# EAGLE board sonic_beacon-pan (EAGLE 7.5.0)
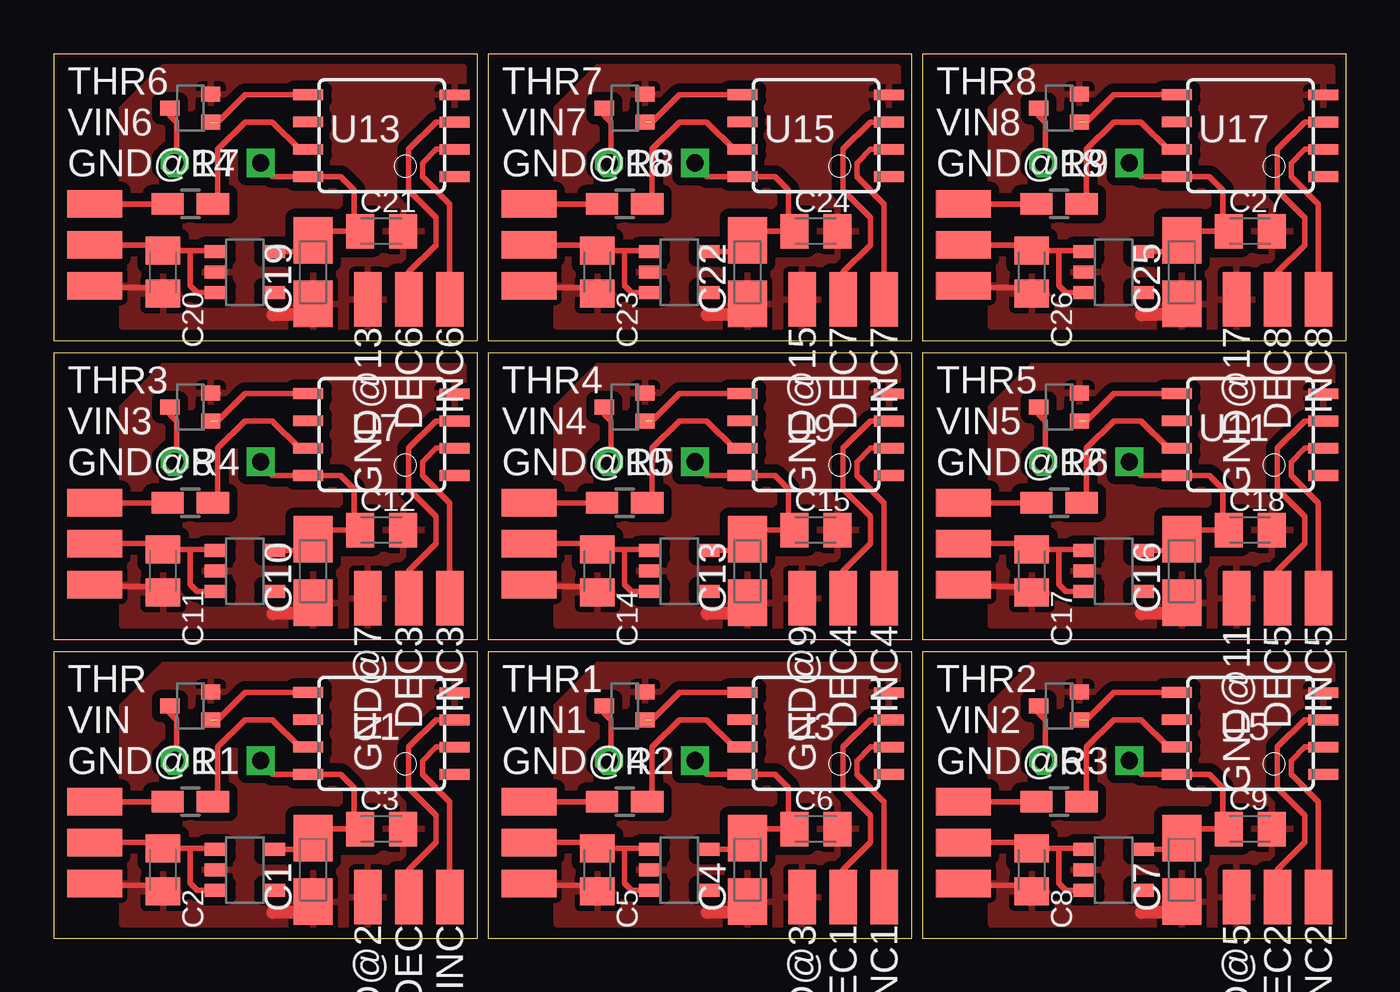
[diagram p0: board, top side]
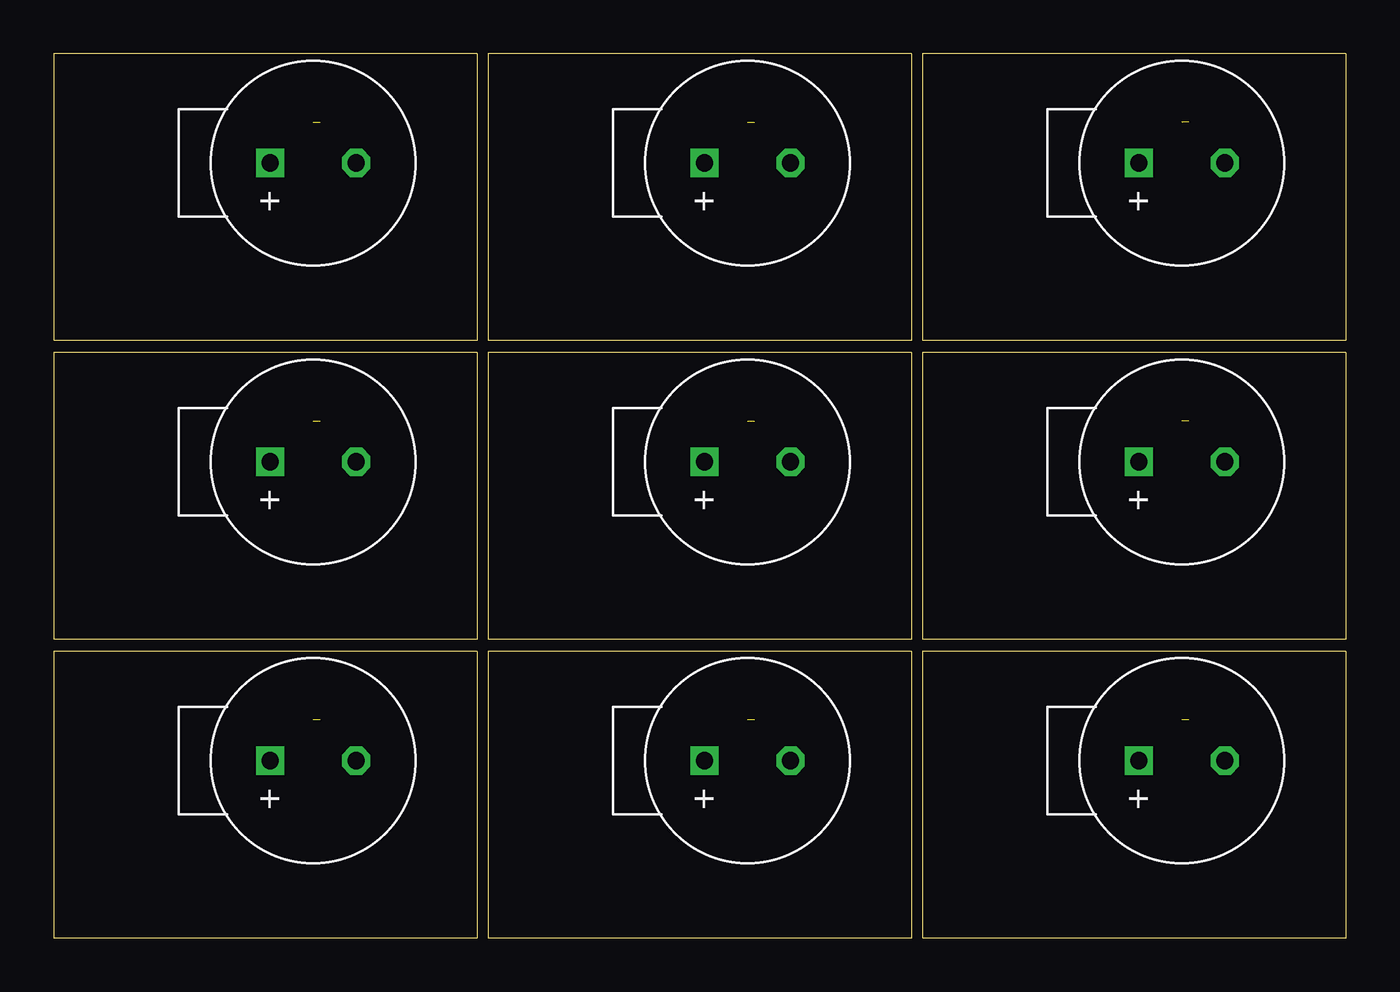
[diagram p1: board, bottom side, seen from below]

Size 60.09 x 41.13 mm. Coordinates in mm from the lower left corner, seen from the top.
Outline: 0,0 19.68,0 19.68,13.34 0,13.34 0,0
Outline: 20.2,0 39.88,0 39.88,13.34 20.2,13.34 20.2,0
Outline: 40.4,0 60.09,0 60.09,13.34 40.4,13.34 40.4,0
Outline: 0,13.9 19.68,13.9 19.68,27.23 0,27.23 0,13.9
Outline: 20.2,13.9 39.88,13.9 39.88,27.23 20.2,27.23 20.2,13.9
Outline: 40.4,13.9 60.09,13.9 60.09,27.23 40.4,27.23 40.4,13.9
Outline: 0,27.8 19.68,27.8 19.68,41.13 0,41.13 0,27.8
Outline: 20.2,27.8 39.88,27.8 39.88,41.13 20.2,41.13 20.2,27.8
Outline: 40.4,27.8 60.09,27.8 60.09,41.13 40.4,41.13 40.4,27.8
Copper layers (1*16): Top 0.035mm / dielectric 1.5mm / Bottom 0.035mm
Design rules "SeeedStudio_2layer_DRU_no_angle_20140221": minimum track width 6mil, minimum drill 12mil, track to track 6mil, track to pad 6mil, pad to pad 6mil, via to via 6mil, smd to smd 0mil, copper to edge 10mil, drill to drill 10mil, minimum pad ring 10mil, minimum via ring 6mil, stop-mask expansion 2mil, vias tented up to drill 100mil, thermal gap 10mil

## Footprints (pad centres in the part's own frame; a part is rotated, then mirrored left to right if it is on the bottom)
A/3216-18W = smd 2.15 x 1.8: + 1.475,0; - -1.475,0
C0805K = smd 1.3 x 1.6: 1 -1,0; 2 1,0
PAD = smd 2.54 x 1.27: P$1 0,0
SC-70 = smd 0.7 x 0.9: 1 -0.65,-0.95; 2 0.65,-0.95; 3 0,0.95
R0805W = smd 1.5 x 1: 1 -1.052,0; 2 1.052,0
8S2 = smd 0.5 x 1.4: 1 -1.905,-3.404; 2 -0.645,-3.404; 3 0.625,-3.404; 4 1.895,-3.404; 5 1.905,3.404; 6 0.635,3.404; 7 -0.635,3.404; 8 -1.905,3.404
SOT-23 = smd 0.6 x 1.05: 1 -0.95,-1.35; 2 0,-1.35; 3 0.95,-1.35; 4 0.95,1.35; 5 -0.95,1.35
HC0903A = drill 0.8 square: 1 0,2 | drill 0.8 octagon: 2 0,-2

## Placement (x,y rotation side)
C1  4.7uF  [A/3216-18W]  12.06,3.17 90 top
C2  4.7uF  [C0805K]  5.08,3.17 270 top
C3  0.1uF  [C0805K]  15.24,5.08 0 top
C4  4.7uF  [A/3216-18W]  32.27,3.17 90 top
C5  4.7uF  [C0805K]  25.28,3.17 270 top
C6  0.1uF  [C0805K]  35.44,5.08 0 top
C7  4.7uF  [A/3216-18W]  52.47,3.17 90 top
C8  4.7uF  [C0805K]  45.48,3.17 270 top
C9  0.1uF  [C0805K]  55.64,5.08 0 top
C10  4.7uF  [A/3216-18W]  12.06,17.07 90 top
C11  4.7uF  [C0805K]  5.08,17.07 270 top
C12  0.1uF  [C0805K]  15.24,18.98 0 top
C13  4.7uF  [A/3216-18W]  32.27,17.07 90 top
C14  4.7uF  [C0805K]  25.28,17.07 270 top
C15  0.1uF  [C0805K]  35.44,18.98 0 top
C16  4.7uF  [A/3216-18W]  52.47,17.07 90 top
C17  4.7uF  [C0805K]  45.48,17.07 270 top
C18  0.1uF  [C0805K]  55.64,18.98 0 top
C19  4.7uF  [A/3216-18W]  12.06,30.98 90 top
C20  4.7uF  [C0805K]  5.08,30.98 270 top
C21  0.1uF  [C0805K]  15.24,32.88 0 top
C22  4.7uF  [A/3216-18W]  32.27,30.98 90 top
C23  4.7uF  [C0805K]  25.28,30.98 270 top
C24  0.1uF  [C0805K]  35.44,32.88 0 top
C25  4.7uF  [A/3216-18W]  52.47,30.98 90 top
C26  4.7uF  [C0805K]  45.48,30.98 270 top
C27  0.1uF  [C0805K]  55.64,32.88 0 top
DEC  [PAD]  16.51,1.91 90 top
DEC1  [PAD]  36.71,1.91 90 top
DEC2  [PAD]  56.91,1.91 90 top
DEC3  [PAD]  16.51,15.8 90 top
DEC4  [PAD]  36.71,15.8 90 top
DEC5  [PAD]  56.91,15.8 90 top
DEC6  [PAD]  16.51,29.7 90 top
DEC7  [PAD]  36.71,29.7 90 top
DEC8  [PAD]  56.91,29.7 90 top
GND@1  [PAD]  1.91,2.54 0 top
GND@2  [PAD]  14.61,1.91 90 top
GND@3  [PAD]  34.8,1.91 90 top
GND@4  [PAD]  22.11,2.54 0 top
GND@5  [PAD]  55.01,1.91 90 top
GND@6  [PAD]  42.3,2.54 0 top
GND@7  [PAD]  14.61,15.8 90 top
GND@8  [PAD]  1.91,16.44 0 top
GND@9  [PAD]  34.8,15.8 90 top
GND@10  [PAD]  22.11,16.44 0 top
GND@11  [PAD]  55.01,15.8 90 top
GND@12  [PAD]  42.3,16.44 0 top
GND@13  [PAD]  14.61,29.7 90 top
GND@14  [PAD]  1.91,30.34 0 top
GND@15  [PAD]  34.8,29.7 90 top
GND@16  [PAD]  22.11,30.34 0 top
GND@17  [PAD]  55.01,29.7 90 top
GND@18  [PAD]  42.3,30.34 0 top
INC  [PAD]  18.41,1.91 90 top
INC1  [PAD]  38.62,1.91 90 top
INC2  [PAD]  58.81,1.91 90 top
INC3  [PAD]  18.41,15.8 90 top
INC4  [PAD]  38.62,15.8 90 top
INC5  [PAD]  58.81,15.8 90 top
INC6  [PAD]  18.41,29.7 90 top
INC7  [PAD]  38.62,29.7 90 top
INC8  [PAD]  58.81,29.7 90 top
Q1  2N7002W  [SC-70]  6.35,10.79 90 top
Q2  2N7002W  [SC-70]  26.55,10.79 90 top
Q3  2N7002W  [SC-70]  46.75,10.79 90 top
Q4  2N7002W  [SC-70]  6.35,24.7 90 top
Q5  2N7002W  [SC-70]  26.55,24.7 90 top
Q6  2N7002W  [SC-70]  46.75,24.7 90 top
Q7  2N7002W  [SC-70]  6.35,38.59 90 top
Q8  2N7002W  [SC-70]  26.55,38.59 90 top
Q9  2N7002W  [SC-70]  46.75,38.59 90 top
R1  100  [R0805W]  6.35,6.35 0 top
R2  100  [R0805W]  26.55,6.35 0 top
R3  100  [R0805W]  46.75,6.35 0 top
R4  100  [R0805W]  6.35,20.25 0 top
R5  100  [R0805W]  26.55,20.25 0 top
R6  100  [R0805W]  46.75,20.25 0 top
R7  100  [R0805W]  6.35,34.15 0 top
R8  100  [R0805W]  26.55,34.15 0 top
R9  100  [R0805W]  46.75,34.15 0 top
THR  [PAD]  1.91,6.35 0 top
THR1  [PAD]  22.11,6.35 0 top
THR2  [PAD]  42.3,6.35 0 top
THR3  [PAD]  1.91,20.25 0 top
THR4  [PAD]  22.11,20.25 0 top
THR5  [PAD]  42.3,20.25 0 top
THR6  [PAD]  1.91,34.15 0 top
THR7  [PAD]  22.11,34.15 0 top
THR8  [PAD]  42.3,34.15 0 top
U1  ATTINY85-20SU  [8S2]  15.24,9.53 90 top
U2  LP2981-33DBVR  [SOT-23]  8.89,3.17 270 top
U3  ATTINY85-20SU  [8S2]  35.44,9.53 90 top
U4  LP2981-33DBVR  [SOT-23]  29.09,3.17 270 top
U5  ATTINY85-20SU  [8S2]  55.64,9.53 90 top
U6  LP2981-33DBVR  [SOT-23]  49.29,3.17 270 top
U7  ATTINY85-20SU  [8S2]  15.24,23.43 90 top
U8  LP2981-33DBVR  [SOT-23]  8.89,17.07 270 top
U9  ATTINY85-20SU  [8S2]  35.44,23.43 90 top
U10  LP2981-33DBVR  [SOT-23]  29.09,17.07 270 top
U11  ATTINY85-20SU  [8S2]  55.64,23.43 90 top
U12  LP2981-33DBVR  [SOT-23]  49.29,17.07 270 top
U13  ATTINY85-20SU  [8S2]  15.24,37.33 90 top
U14  LP2981-33DBVR  [SOT-23]  8.89,30.98 270 top
U15  ATTINY85-20SU  [8S2]  35.44,37.33 90 top
U16  LP2981-33DBVR  [SOT-23]  29.09,30.98 270 top
U17  ATTINY85-20SU  [8S2]  55.64,37.33 90 top
U18  LP2981-33DBVR  [SOT-23]  49.29,30.98 270 top
VIN  [PAD]  1.91,4.45 0 top
VIN1  [PAD]  22.11,4.45 0 top
VIN2  [PAD]  42.3,4.45 0 top
VIN3  [PAD]  1.91,18.34 0 top
VIN4  [PAD]  22.11,18.34 0 top
VIN5  [PAD]  42.3,18.34 0 top
VIN6  [PAD]  1.91,32.24 0 top
VIN7  [PAD]  22.11,32.24 0 top
VIN8  [PAD]  42.3,32.24 0 top
X1  HC0903A  [HC0903A]  7.62,8.26 90 bottom
X2  HC0903A  [HC0903A]  27.82,8.26 90 bottom
X3  HC0903A  [HC0903A]  48.02,8.26 90 bottom
X4  HC0903A  [HC0903A]  7.62,22.16 90 bottom
X5  HC0903A  [HC0903A]  27.82,22.16 90 bottom
X6  HC0903A  [HC0903A]  48.02,22.16 90 bottom
X7  HC0903A  [HC0903A]  7.62,36.05 90 bottom
X8  HC0903A  [HC0903A]  27.82,36.05 90 bottom
X9  HC0903A  [HC0903A]  48.02,36.05 90 bottom

## Library data of the parts
C1-C27 DEC DEC1-DEC8 GND@1-GND@18 INC INC1-INC8 Q1-Q9 R1-R9 THR THR1-THR8 U1-U18 VIN VIN1-VIN8 X1-X9 = sonic_beacon

## Nets
DEC: DEC.P$1 U1.3
DEC1: DEC1.P$1 U3.3
DEC2: DEC2.P$1 U5.3
DEC3: DEC3.P$1 U7.3
DEC4: DEC4.P$1 U9.3
DEC5: DEC5.P$1 U11.3
DEC6: DEC6.P$1 U13.3
DEC7: DEC7.P$1 U15.3
DEC8: DEC8.P$1 U17.3
GND: C1.- C2.2 C3.2 GND@1.P$1 GND@2.P$1 Q1.2 U1.4 U2.2
GND1: C4.- C5.2 C6.2 GND@3.P$1 GND@4.P$1 Q2.2 U3.4 U4.2
GND2: C7.- C8.2 C9.2 GND@5.P$1 GND@6.P$1 Q3.2 U5.4 U6.2
GND3: C10.- C11.2 C12.2 GND@7.P$1 GND@8.P$1 Q4.2 U7.4 U8.2
GND4: C13.- C14.2 C15.2 GND@9.P$1 GND@10.P$1 Q5.2 U9.4 U10.2
GND5: C16.- C17.2 C18.2 GND@11.P$1 GND@12.P$1 Q6.2 U11.4 U12.2
GND6: C19.- C20.2 C21.2 GND@13.P$1 GND@14.P$1 Q7.2 U13.4 U14.2
GND7: C22.- C23.2 C24.2 GND@15.P$1 GND@16.P$1 Q8.2 U15.4 U16.2
GND8: C25.- C26.2 C27.2 GND@17.P$1 GND@18.P$1 Q9.2 U17.4 U18.2
INC: INC.P$1 U1.2
INC1: INC1.P$1 U3.2
INC2: INC2.P$1 U5.2
INC3: INC3.P$1 U7.2
INC4: INC4.P$1 U9.2
INC5: INC5.P$1 U11.2
INC6: INC6.P$1 U13.2
INC7: INC7.P$1 U15.2
INC8: INC8.P$1 U17.2
N$1: Q1.1 U1.5
N$2: Q1.3 X1.2
N$3: Q2.1 U3.5
N$4: R1.2 U1.7
N$5: Q2.3 X2.2
N$6: R2.2 U3.7
N$7: Q3.1 U5.5
N$8: Q3.3 X3.2
N$9: R3.2 U5.7
N$10: Q4.1 U7.5
N$11: Q4.3 X4.2
N$12: R4.2 U7.7
N$13: Q5.1 U9.5
N$14: Q5.3 X5.2
N$15: R5.2 U9.7
N$16: Q6.1 U11.5
N$17: Q6.3 X6.2
N$18: R6.2 U11.7
N$19: Q7.1 U13.5
N$20: Q7.3 X7.2
N$21: R7.2 U13.7
N$22: Q8.1 U15.5
N$23: Q8.3 X8.2
N$24: R8.2 U15.7
N$25: Q9.1 U17.5
N$26: Q9.3 X9.2
N$27: R9.2 U17.7
THR: R1.1 THR.P$1
THR1: R2.1 THR1.P$1
THR2: R3.1 THR2.P$1
THR3: R4.1 THR3.P$1
THR4: R5.1 THR4.P$1
THR5: R6.1 THR5.P$1
THR6: R7.1 THR6.P$1
THR7: R8.1 THR7.P$1
THR8: R9.1 THR8.P$1
VCC: C1.+ C3.1 U1.8 U2.5 X1.1
VCC1: C4.+ C6.1 U3.8 U4.5 X2.1
VCC2: C7.+ C9.1 U5.8 U6.5 X3.1
VCC3: C10.+ C12.1 U7.8 U8.5 X4.1
VCC4: C13.+ C15.1 U9.8 U10.5 X5.1
VCC5: C16.+ C18.1 U11.8 U12.5 X6.1
VCC6: C19.+ C21.1 U13.8 U14.5 X7.1
VCC7: C22.+ C24.1 U15.8 U16.5 X8.1
VCC8: C25.+ C27.1 U17.8 U18.5 X9.1
VIN: C2.1 U2.1 U2.3 VIN.P$1
VIN1: C5.1 U4.1 U4.3 VIN1.P$1
VIN2: C8.1 U6.1 U6.3 VIN2.P$1
VIN3: C11.1 U8.1 U8.3 VIN3.P$1
VIN4: C14.1 U10.1 U10.3 VIN4.P$1
VIN5: C17.1 U12.1 U12.3 VIN5.P$1
VIN6: C20.1 U14.1 U14.3 VIN6.P$1
VIN7: C23.1 U16.1 U16.3 VIN7.P$1
VIN8: C26.1 U18.1 U18.3 VIN8.P$1

## Tracks (layer width: path | path; a pad name or v marks a point on that pad's centre or on a via)
DEC
  Top 0.254: DEC.P$1 16.51,3.17 17.78,4.45 17.78,5.71 16.51,6.99 16.51,8.89 17.78,10.16 U1.3
DEC1
  Top 0.254: DEC1.P$1 36.71,3.17 37.98,4.45 37.98,5.71 36.71,6.99 36.71,8.89 37.98,10.16 U3.3
DEC2
  Top 0.254: DEC2.P$1 56.91,3.17 58.18,4.45 58.18,5.71 56.91,6.99 56.91,8.89 58.18,10.16 U5.3
DEC3
  Top 0.254: DEC3.P$1 16.51,17.07 17.78,18.34 17.78,19.61 16.51,20.89 16.51,22.79 17.78,24.06 U7.3
DEC4
  Top 0.254: DEC4.P$1 36.71,17.07 37.98,18.34 37.98,19.61 36.71,20.89 36.71,22.79 37.98,24.06 U9.3
DEC5
  Top 0.254: DEC5.P$1 56.91,17.07 58.18,18.34 58.18,19.61 56.91,20.89 56.91,22.79 58.18,24.06 U11.3
DEC6
  Top 0.254: DEC6.P$1 16.51,30.98 17.78,32.24 17.78,33.52 16.51,34.78 16.51,36.69 17.78,37.96 U13.3
DEC7
  Top 0.254: DEC7.P$1 36.71,30.98 37.98,32.24 37.98,33.52 36.71,34.78 36.71,36.69 37.98,37.96 U15.3
DEC8
  Top 0.254: DEC8.P$1 56.91,30.98 58.18,32.24 58.18,33.52 56.91,34.78 56.91,36.69 58.18,37.96 U17.3
GND
  Top 0.254: GND@1.P$1 2.06,2.46 4.8,2.46 5.03,2.23 C2.2 5.26,2.23 5.41,2.23 5.41,2.21 | C1.- 12.27,1.7 12.7,1.27 | 16.51,5.08 C3.2 16.24,5.35 | U1.4 | Q1.2 7.63,11.45
  Top 0.6: C1.- 11.5,1.2 10.2,1.2
  pour Top (isolate 0.4): 3.17,0.64 3.17,10.79 5.08,12.7 19.05,12.7 19.05,0.64
GND1
  Top 0.254: GND@4.P$1 22.26,2.46 25,2.46 25.23,2.23 C5.2 25.46,2.23 25.61,2.23 25.61,2.21 | C4.- 32.47,1.7 32.9,1.27 | 36.71,5.08 C6.2 36.44,5.35 | U3.4 | Q2.2 27.84,11.45
  Top 0.6: C4.- 31.7,1.2 30.4,1.2
  pour Top (isolate 0.4): 23.38,0.64 23.38,10.79 25.28,12.7 39.25,12.7 39.25,0.64
GND2
  Top 0.254: GND@6.P$1 42.46,2.46 45.2,2.46 45.43,2.23 C8.2 45.66,2.23 45.81,2.23 45.81,2.21 | C7.- 52.67,1.7 53.1,1.27 | 56.91,5.08 C9.2 56.64,5.35 | U5.4 | Q3.2 48.03,11.45
  Top 0.6: C7.- 51.9,1.2 50.6,1.2
  pour Top (isolate 0.4): 43.58,0.64 43.58,10.79 45.48,12.7 59.45,12.7 59.45,0.64
GND3
  Top 0.254: GND@8.P$1 2.06,16.36 4.8,16.36 5.03,16.14 C11.2 5.26,16.14 5.41,16.14 5.41,16.11 | C10.- 12.27,15.6 12.7,15.17 | 16.51,18.98 C12.2 16.24,19.25 | U7.4 | Q4.2 7.63,25.34
  Top 0.6: C10.- 11.5,15.1 10.2,15.1
  pour Top (isolate 0.4): 3.17,14.54 3.17,24.7 5.08,26.6 19.05,26.6 19.05,14.54
GND4
  Top 0.254: GND@10.P$1 22.26,16.36 25,16.36 25.23,16.14 C14.2 25.46,16.14 25.61,16.14 25.61,16.11 | C13.- 32.47,15.6 32.9,15.17 | 36.71,18.98 C15.2 36.44,19.25 | U9.4 | Q5.2 27.84,25.34
  Top 0.6: C13.- 31.7,15.1 30.4,15.1
  pour Top (isolate 0.4): 23.38,14.54 23.38,24.7 25.28,26.6 39.25,26.6 39.25,14.54
GND5
  Top 0.254: GND@12.P$1 42.46,16.36 45.2,16.36 45.43,16.14 C17.2 45.66,16.14 45.81,16.14 45.81,16.11 | C16.- 52.67,15.6 53.1,15.17 | 56.91,18.98 C18.2 56.64,19.25 | U11.4 | Q6.2 48.03,25.34
  Top 0.6: C16.- 51.9,15.1 50.6,15.1
  pour Top (isolate 0.4): 43.58,14.54 43.58,24.7 45.48,26.6 59.45,26.6 59.45,14.54
GND6
  Top 0.254: GND@14.P$1 2.06,30.26 4.8,30.26 5.03,30.04 C20.2 5.26,30.04 5.41,30.04 5.41,30.01 | C19.- 12.27,29.5 12.7,29.07 | 16.51,32.88 C21.2 16.24,33.15 | U13.4 | Q7.2 7.63,39.24
  Top 0.6: C19.- 11.5,29 10.2,29
  pour Top (isolate 0.4): 3.17,28.43 3.17,38.59 5.08,40.5 19.05,40.5 19.05,28.43
GND7
  Top 0.254: GND@16.P$1 22.26,30.26 25,30.26 25.23,30.04 C23.2 25.46,30.04 25.61,30.04 25.61,30.01 | C22.- 32.47,29.5 32.9,29.07 | 36.71,32.88 C24.2 36.44,33.15 | U15.4 | Q8.2 27.84,39.24
  Top 0.6: C22.- 31.7,29 30.4,29
  pour Top (isolate 0.4): 23.38,28.43 23.38,38.59 25.28,40.5 39.25,40.5 39.25,28.43
GND8
  Top 0.254: GND@18.P$1 42.46,30.26 45.2,30.26 45.43,30.04 C26.2 45.66,30.04 45.81,30.04 45.81,30.01 | C25.- 52.67,29.5 53.1,29.07 | 56.91,32.88 C27.2 56.64,33.15 | U17.4 | Q9.2 48.03,39.24
  Top 0.6: C25.- 51.9,29 50.6,29
  pour Top (isolate 0.4): 43.58,28.43 43.58,38.59 45.48,40.5 59.45,40.5 59.45,28.43
INC
  Top 0.254: INC.P$1 18.41,6.35 17.14,7.62 17.14,8.26 17.78,8.89 U1.2
INC1
  Top 0.254: INC1.P$1 38.62,6.35 37.34,7.62 37.34,8.26 37.98,8.89 U3.2
INC2
  Top 0.254: INC2.P$1 58.81,6.35 57.55,7.62 57.55,8.26 58.18,8.89 U5.2
INC3
  Top 0.254: INC3.P$1 18.41,20.25 17.14,21.52 17.14,22.16 17.78,22.79 U7.2
INC4
  Top 0.254: INC4.P$1 38.62,20.25 37.34,21.52 37.34,22.16 37.98,22.79 U9.2
INC5
  Top 0.254: INC5.P$1 58.81,20.25 57.55,21.52 57.55,22.16 58.18,22.79 U11.2
INC6
  Top 0.254: INC6.P$1 18.41,34.15 17.14,35.42 17.14,36.05 17.78,36.69 U13.2
INC7
  Top 0.254: INC7.P$1 38.62,34.15 37.34,35.42 37.34,36.05 37.98,36.69 U15.2
INC8
  Top 0.254: INC8.P$1 58.81,34.15 57.55,35.42 57.55,36.05 58.18,36.69 U17.2
N$1  (1 unrouted)
  Top 0.254: U1.5 8.89,11.43 7.62,10.16
N$2
  Top 0.254: Q1.3 5.4,10.47 5.71,10.16 5.71,8.35 X1.2
N$3  (1 unrouted)
  Top 0.254: U3.5 29.09,11.43 27.82,10.16
N$4
  Top 0.254: U1.7 11.43,8.89 10.16,10.16 8.89,10.16 7.62,8.89 7.62,6.57 R1.2
N$5
  Top 0.254: Q2.3 25.6,10.47 25.91,10.16 25.91,8.35 X2.2
N$6
  Top 0.254: U3.7 31.63,8.89 30.36,10.16 29.09,10.16 27.82,8.89 27.82,6.57 R2.2
N$7  (1 unrouted)
  Top 0.254: U5.5 49.29,11.43 48.02,10.16
N$8
  Top 0.254: Q3.3 45.8,10.47 46.12,10.16 46.12,8.35 X3.2
N$9
  Top 0.254: U5.7 51.83,8.89 50.56,10.16 49.29,10.16 48.02,8.89 48.02,6.57 R3.2
N$10  (1 unrouted)
  Top 0.254: U7.5 8.89,25.33 7.62,24.06
N$11
  Top 0.254: Q4.3 5.4,24.38 5.71,24.06 5.71,22.25 X4.2
N$12
  Top 0.254: U7.7 11.43,22.79 10.16,24.06 8.89,24.06 7.62,22.79 7.62,20.47 R4.2
N$13  (1 unrouted)
  Top 0.254: U9.5 29.09,25.33 27.82,24.06
N$14
  Top 0.254: Q5.3 25.6,24.38 25.91,24.06 25.91,22.25 X5.2
N$15
  Top 0.254: U9.7 31.63,22.79 30.36,24.06 29.09,24.06 27.82,22.79 27.82,20.47 R5.2
N$16  (1 unrouted)
  Top 0.254: U11.5 49.29,25.33 48.02,24.06
N$17
  Top 0.254: Q6.3 45.8,24.38 46.12,24.06 46.12,22.25 X6.2
N$18
  Top 0.254: U11.7 51.83,22.79 50.56,24.06 49.29,24.06 48.02,22.79 48.02,20.47 R6.2
N$19  (1 unrouted)
  Top 0.254: U13.5 8.89,39.23 7.62,37.96
N$20
  Top 0.254: Q7.3 5.4,38.27 5.71,37.96 5.71,36.15 X7.2
N$21
  Top 0.254: U13.7 11.43,36.69 10.16,37.96 8.89,37.96 7.62,36.69 7.62,34.37 R7.2
N$22  (1 unrouted)
  Top 0.254: U15.5 29.09,39.23 27.82,37.96
N$23
  Top 0.254: Q8.3 25.6,38.27 25.91,37.96 25.91,36.15 X8.2
N$24
  Top 0.254: U15.7 31.63,36.69 30.36,37.96 29.09,37.96 27.82,36.69 27.82,34.37 R8.2
N$25  (1 unrouted)
  Top 0.254: U17.5 49.29,39.23 48.02,37.96
N$26
  Top 0.254: Q9.3 45.8,38.27 46.12,37.96 46.12,36.15 X9.2
N$27
  Top 0.254: U17.7 51.83,36.69 50.56,37.96 49.29,37.96 48.02,36.69 48.02,34.37 R9.2
THR
  Top 0.254: THR.P$1 R1.1
THR1
  Top 0.254: THR1.P$1 R2.1
THR2
  Top 0.254: THR2.P$1 R3.1
THR3
  Top 0.254: THR3.P$1 R4.1
THR4
  Top 0.254: THR4.P$1 R5.1
THR5
  Top 0.254: THR5.P$1 R6.1
THR6
  Top 0.254: THR6.P$1 R7.1
THR7
  Top 0.254: THR7.P$1 R8.1
THR8
  Top 0.254: THR8.P$1 R9.1
VCC
  Top 0.254: U2.5 11.54,4.12 C1.+ 12.27,4.65 12.7,5.08 13.97,5.08 | C3.1 13.97,5.08 | 13.97,5.08 13.97,6.99 13.34,7.62 U1.8 10.16,7.62 10.16,7.71 X1.1
VCC1
  Top 0.254: U4.5 31.74,4.12 C4.+ 32.47,4.65 32.9,5.08 34.17,5.08 | C6.1 34.17,5.08 | 34.17,5.08 34.17,6.99 33.53,7.62 U3.8 30.36,7.62 30.36,7.71 X2.1
VCC2
  Top 0.254: U6.5 51.94,4.12 C7.+ 52.67,4.65 53.1,5.08 54.37,5.08 | C9.1 54.37,5.08 | 54.37,5.08 54.37,6.99 53.73,7.62 U5.8 50.56,7.62 50.56,7.71 X3.1
VCC3
  Top 0.254: U8.5 11.54,18.02 C10.+ 12.27,18.55 12.7,18.98 13.97,18.98 | C12.1 13.97,18.98 | 13.97,18.98 13.97,20.89 13.34,21.52 U7.8 10.16,21.52 10.16,21.61 X4.1
VCC4
  Top 0.254: U10.5 31.74,18.02 C13.+ 32.47,18.55 32.9,18.98 34.17,18.98 | C15.1 34.17,18.98 | 34.17,18.98 34.17,20.89 33.53,21.52 U9.8 30.36,21.52 30.36,21.61 X5.1
VCC5
  Top 0.254: U12.5 51.94,18.02 C16.+ 52.67,18.55 53.1,18.98 54.37,18.98 | C18.1 54.37,18.98 | 54.37,18.98 54.37,20.89 53.73,21.52 U11.8 50.56,21.52 50.56,21.61 X6.1
VCC6
  Top 0.254: U14.5 11.54,31.93 C19.+ 12.27,32.45 12.7,32.88 13.97,32.88 | C21.1 13.97,32.88 | 13.97,32.88 13.97,34.78 13.34,35.42 U13.8 10.16,35.42 10.16,35.52 X7.1
VCC7
  Top 0.254: U16.5 31.74,31.93 C22.+ 32.47,32.45 32.9,32.88 34.17,32.88 | C24.1 34.17,32.88 | 34.17,32.88 34.17,34.78 33.53,35.42 U15.8 30.36,35.42 30.36,35.52 X8.1
VCC8
  Top 0.254: U18.5 51.94,31.93 C25.+ 52.67,32.45 53.1,32.88 54.37,32.88 | C27.1 54.37,32.88 | 54.37,32.88 54.37,34.78 53.73,35.42 U17.8 50.56,35.42 50.56,35.52 X9.1
VIN
  Top 0.254: VIN.P$1 5.08,4.45 C2.1 6.35,4.17 | 6.35,4.17 7.49,4.17 U2.1 | U2.3 6.67,2.23 6.35,2.54 6.35,4.17
VIN1
  Top 0.254: VIN1.P$1 25.28,4.45 C5.1 26.55,4.17 | 26.55,4.17 27.69,4.17 U4.1 | U4.3 26.86,2.23 26.55,2.54 26.55,4.17
VIN2
  Top 0.254: VIN2.P$1 45.48,4.45 C8.1 46.75,4.17 | 46.75,4.17 47.89,4.17 U6.1 | U6.3 47.06,2.23 46.75,2.54 46.75,4.17
VIN3
  Top 0.254: VIN3.P$1 5.08,18.34 C11.1 6.35,18.07 | 6.35,18.07 7.49,18.07 U8.1 | U8.3 6.67,16.12 6.35,16.44 6.35,18.07
VIN4
  Top 0.254: VIN4.P$1 25.28,18.34 C14.1 26.55,18.07 | 26.55,18.07 27.69,18.07 U10.1 | U10.3 26.86,16.12 26.55,16.44 26.55,18.07
VIN5
  Top 0.254: VIN5.P$1 45.48,18.34 C17.1 46.75,18.07 | 46.75,18.07 47.89,18.07 U12.1 | U12.3 47.06,16.12 46.75,16.44 46.75,18.07
VIN6
  Top 0.254: VIN6.P$1 5.08,32.24 C20.1 6.35,31.98 | 6.35,31.98 7.49,31.98 U14.1 | U14.3 6.67,30.02 6.35,30.34 6.35,31.98
VIN7
  Top 0.254: VIN7.P$1 25.28,32.24 C23.1 26.55,31.98 | 26.55,31.98 27.69,31.98 U16.1 | U16.3 26.86,30.02 26.55,30.34 26.55,31.98
VIN8
  Top 0.254: VIN8.P$1 45.48,32.24 C26.1 46.75,31.98 | 46.75,31.98 47.89,31.98 U18.1 | U18.3 47.06,30.02 46.75,30.34 46.75,31.98

## Text on the board
_tNames: THR | THR | THR | VIN | U1 | VIN | U1 | VIN | U1 | GND@1 | GND@1 | GND@1 | R1 | R1 | R1 | C3 | C3 | C3 | C2 | C2 | C2 | C1 | C1 | C1 | GND@2 | DEC | INC | GND@2 | DEC | INC | GND@2 | DEC | INC | THR | THR | THR | VIN | U1 | VIN | U1 | VIN | U1 | GND@1 | R1 | GND@1 | R1 | GND@1 | R1 | C3 | C3 | C3 | C2 | C2 | C2 | C1 | GND@2 | DEC | INC | C1 | GND@2 | DEC | INC | C1 | GND@2 | DEC | INC | THR | THR | THR | VIN | U1 | VIN | U1 | VIN | U1 | GND@1 | R1 | GND@1 | R1 | GND@1 | R1 | C3 | C3 | C3 | C2 | C2 | C2 | C1 | GND@2 | DEC | INC | C1 | GND@2 | DEC | INC | C1 | GND@2 | DEC | INC